# Altium PCB BoostBreakoutV1.PcbDoc
Units mil, origin at the board's own origin, x right, y up, seen from the top; angles counter-clockwise.
Board outline 806 x 642 mil, 2 copper layers (Top Layer, Bottom Layer); 16 components, 5 nets, 33 pads, 6 vias.
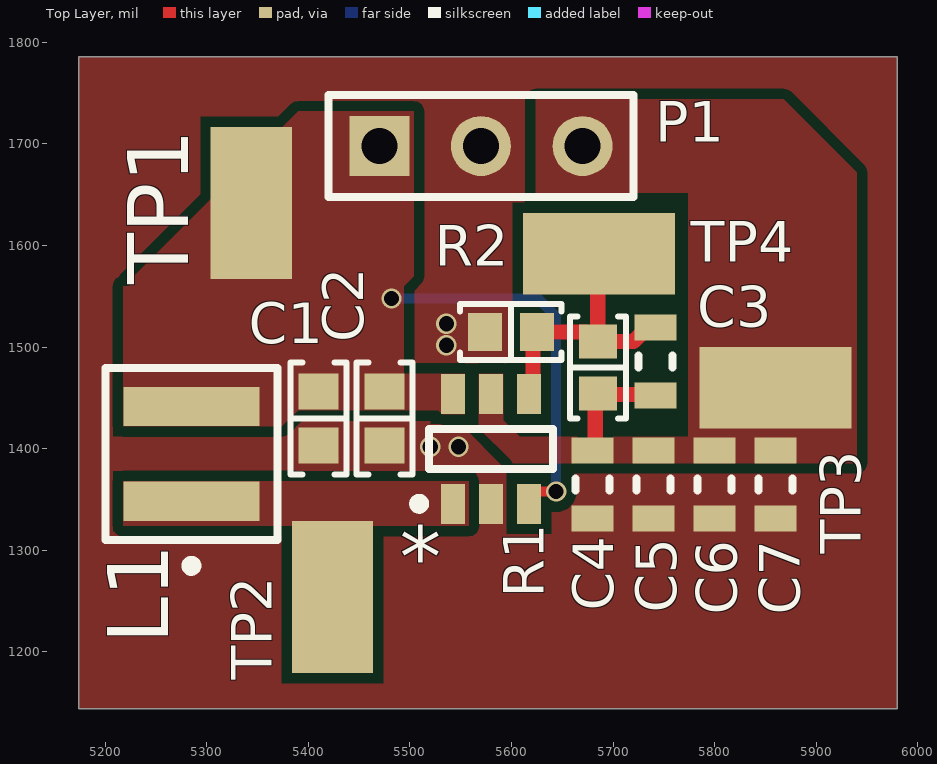
[diagram p0: Top Layer view]
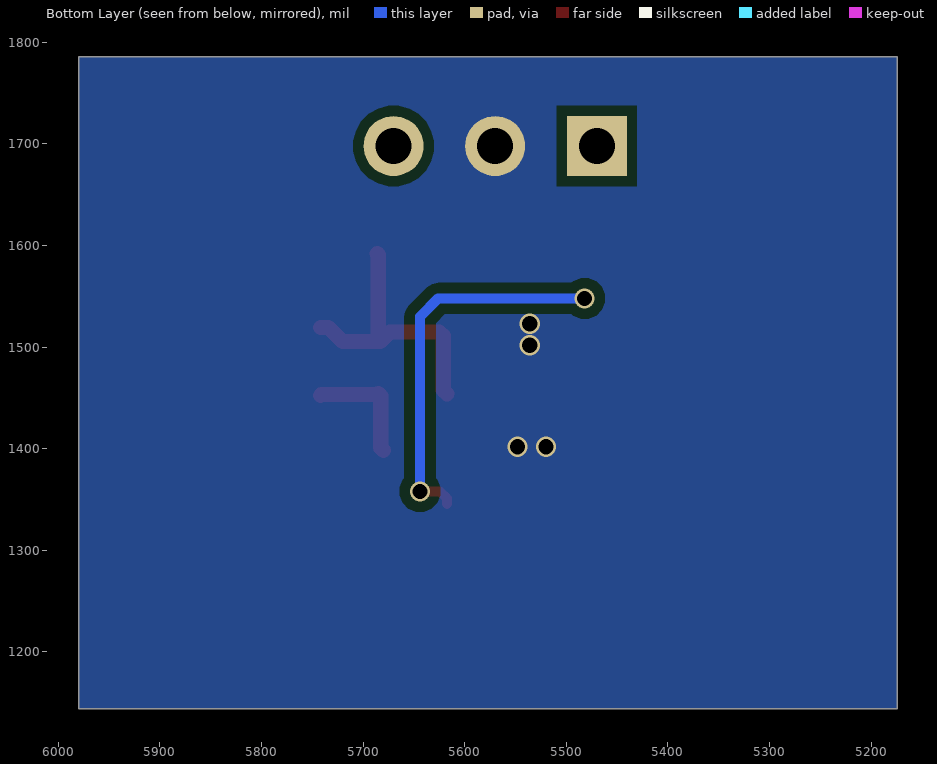
[diagram p1: Bottom Layer view, seen from below]
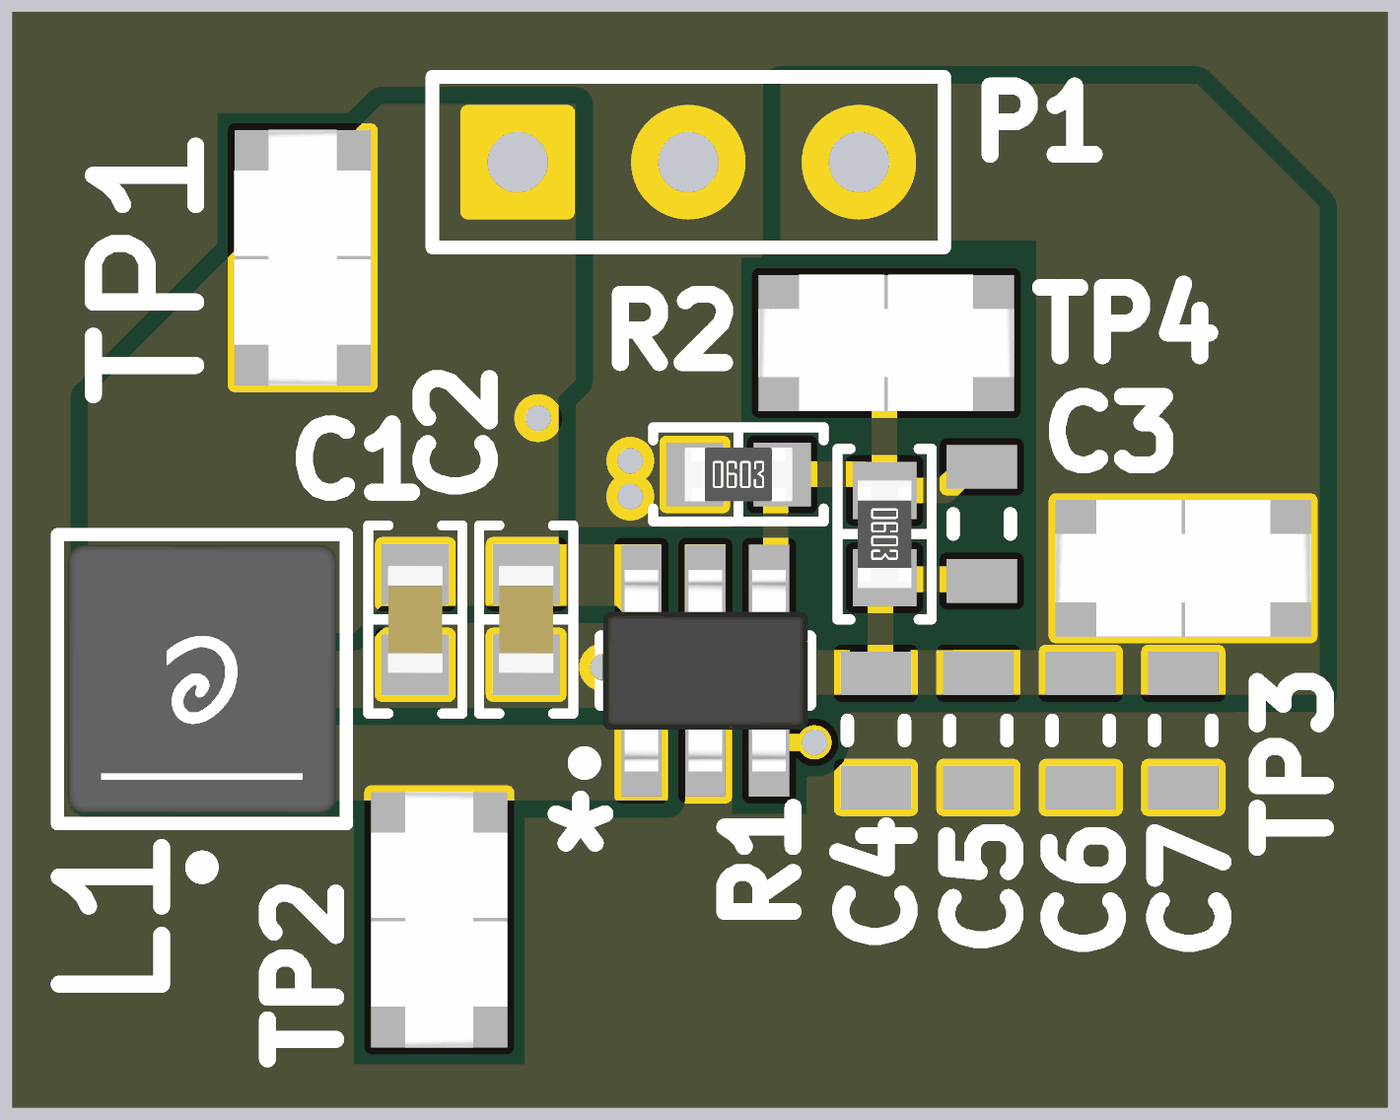
[diagram p2: 3D render of the assembled board from above, using the file's embedded part models]

## Layer stack, top to bottom
Top Solder: solder mask 0.4, Solder Resist, Dk 3.5
Top Layer: signal copper 1.4
Dielectric 1: dielectric 12.6, FR-4, Dk 4.8
Bottom Layer: signal copper 1.4
Bottom Solder: solder mask 0.4, Solder Resist, Dk 3.5

## Board outline
5174,1144 5980,1144 5980,1786 5174,1786

## Design rules (kind name [scope] priority, off if disabled: settings)
Clearance [All] p1: gap=10 ignorepadtopadclearanceinfootprint=FALSE except(0: Arc-Hole Track-Hole SMDPad-Hole THPad-Hole Via-Hole Fill-Hole Poly-Hole Region-Hole Text-Hole)
PolygonConnect [All] p1: connectstyle=Direct reliefconductorwidth=10 reliefentries=4 polygonreliefangle="90 Angle" airgapwidth=10
RoutingVias [All] p1: holewidth=28 width=50 viastyle="Through Hole" minholewidth=28 minwidth=50 maxholewidth=28 maxwidth=50
SolderMaskExpansion [All] p1: expansion=4 istentingtop=FALSE
Width [All] p1: maxlimit=50 minlimit=10 preferedwidth=10
30 further rules are at their usual default settings.

## Components (designator, comment, footprint, x,y, rotation, side; value= is the part's Value field where it differs from the comment)
* "TLV61070ADBVR" SOT95P280X145-6N 5580,1400 r90 top
C1 "10 µF" "CAP 0603_1608" 5410,1430 r270 top
C2 "10 µF" "CAP 0603_1608" 5475,1430 r270 top
C3 "C1608X5R1A226M080AC" CAPC1608X100X20ML10 5742,1486 r270 top
C4 "C1608X5R1A226M080AC" CAPC1608X100X20ML10 5680,1365 r90 top
C5 "C1608X5R1A226M080AC" CAPC1608X100X20ML10 5740,1365 r90 top
C6 "C1608X5R1A226M080AC" CAPC1608X100X20ML10 5800,1365 r90 top
C7 "C1608X5R1A226M080AC" CAPC1608X100X20ML10 5860,1365 r90 top
L1 "XGL4030-222MEC" FP-XGL4030-MFG 5285,1395 r90 top
P1 "Header 3" HDR1X3 5470,1698 r0 top
R1 "220 kOhms" "RES 0603_1608" 5685,1480 r270 top
R2 "24.3 kOhms" "RES 0603_1608" 5599.41,1515 r0 top
TP1 "5019" KSTN-5019_V 5344,1642 r90 top
TP2 "5019" KSTN-5019_V 5424,1254 r270 top
TP3 "5019" KSTN-5019_V 5860,1460 r0 top
TP4 "5019" KSTN-5019_V 5686,1592 r0 top

## Footprints (in the part's own frame and the unit in brackets; to place one, negate y for a bottom-side part, rotate by r counter-clockwise, add the part's x,y. Pads: shape width x height; smd on the part's side, far side on the other; paste and mask are expansions set on the pad)
"CAP 0603_1608" [mm] "Chip Capacitor, 2-Leads, Body 1.60x0.80mm, IPC Medium Density"
  rect 0.9x1 smd: 1(-0.675,0) 2(0.675,0)
  silkscreen extent -1.4,-0.7 1.4,0.7, body extent -0.8,-0.41 0.8,0.41, height 0.82
CAPC1608X100X20ML10 [mm] "Chip Capacitor, 2-Leads, Body 1.70x0.90mm, IPC Low Density"
  rect 0.65x1.05 smd: 1(-0.85,0) 2(0.85,0)
  silkscreen extent -0.15,-0.43 0.15,0.43, body extent -0.85,-0.45 0.85,0.45, height 1
FP-XGL4030-MFG [mm]
  rect 0.98x3.4 smd paste+0 mask+0: 1(-1.185,0) 2(1.185,0)
  silkscreen extent -2.92,-2.15 2.15,2.15, body extent -2.25,-2.25 2.25,2.25, height 0.25
HDR1X3 [mm] "Connector; Header; 3 Position"
  rect 1.5x1.5 hole 0.9: 1(0,0)
  round 1.5 hole 0.9: 2(2.54,0) 3(5.08,0)
  silkscreen extent -1.27,-1.27 6.35,1.27
KSTN-5019_V [mm] "Test Point, 1-Leads, Body 3.81x2.03mm"
  rect 3.8x2.03 smd: 1(0,0)
  body extent -1.9,-1.01 1.9,1.02, height 2.29
"RES 0603_1608" [mm] "Chip Resistor, 2-Leads, Body 1.60x0.80mm, IPC Medium Density"
  rect 0.85x0.95 smd: 1(-0.65,0) 2(0.65,0)
  silkscreen extent -1.27,-0.7 1.27,0.7, body extent -0.8,-0.4 0.8,0.4, height 0.45
SOT95P280X145-6N [mm] "SOT23, 6-Leads, Body 2.90x2.80mm, Pitch 0.95mm, IPC Medium Density"
  rect 1x0.6 smd: 1(-1.375,0.95) 2(-1.375,0) 3(-1.375,-0.95) 4(1.375,-0.95) 5(1.375,0) 6(1.375,0.95)
  silkscreen extent -1.5,-1.55 0.5,1.92, body extent -1.5,-1.53 1.5,1.53, height 1.45

## Part data
C1 C2: library part GRM188R61E106KA73J, "CAP CER 10UF 25V X5R 0603", Device Package="0603 (1608 Metric)", manufacturer="Murata Electronics", Operating Temperature="-55°C ~ 85°C", Supplier Part Number 1=490-GRM188R61E106KA73JCT-ND, Temperature Coefficient=X5R, Tolerance=±10%, Voltage - Rated=25V, Applications="General Purpose", Capacitance="10 µF", componentlink1description=Datasheet, componentlink1url=https://search.murata.co.jp/Ceramy/image/img/A01X/G101/ENG/GRM188R61E106KA73-01A.pdf, componentlink2description="DigiKey Link", componentlink2url=https://www.digikey.com/en/products/detail/murata-electronics/GRM188R61E106KA73J/9887674, lastupdated="2023-01-03 8:06:37 PM", Lifecycle Status=Active, Minimum Order=1, Mounting Type="Surface Mount, MLCC", Package / Case="0603 (1608 Metric)", packaging=TapeAndReel, Part Number=GRM188R61E106KA73J, Part Status=Active, partid=39529, price=0.04, series=GRM, Size / Dimension="0.063\" L x 0.031\" W (1.60mm x 0.80mm)", Supplier 1=DigiKey, Thickness (Max)="0.039\" (1.00mm)"
C3 C4 C5 C6 C7: library part CMP-2000-05441-1, "Chip Capacitor, 22 uF, +/- 20%, 10 V, -55 to 85 degC, 0603 (1608 Metric), RoHS, Tape and Reel", Capacitance=22µF, manufacturer=TDK, Operating Temperature=-55degC~85degC, Package / Case=0603(1608Metric), Package Description="2-Pin Surface Mount Device, Body 1.6 x 0.8 mm", Package Reference=603, PCN Part Number=MLCCPartNumberChange30/Nov/2012, Ratings=-, Standard Package=1, Temperature Coefficient=X5R, Tolerance=±20%, Voltage - Rated=10V, Applications=GeneralPurpose, Category=Capacitors, Datasheet URL=http://download.siliconexpert.com/pdfs/2015/4/21/15/54/45/779/tdk_/manual/37024850441143360mlcc_commercial_general_en.pdf, Datasheet Version=Mar-15, Design Resources=20WNon-IsolatedBuckLEDDriverUsingPLLNK460KG, Family=CeramicCapacitors, Features=-, Height - Seated (Max)=-, Kits=445-9014-KIT-ND-KITMLCC100PF-22UF060310-50V, Lead Spacing=-, Lead Style=-, Manufacturer URL=http://www.tdk.com/, Mounting Type=SurfaceMount,MLCC, Online Catalog=CSeries,GeneralPurpose, Other Names=445-9077-1, packaging=CutTape(CT), Product Training Modules=CSeriesGeneralApplicationsSEAT,CCV,andTVCLDesignToolsGuidetoReplacinganElectrolyticCapacitorwithanMLCC, RoHS Information=RoHSCertificate-MLCC, series=C, Size / Dimension="0.063\"Lx0.031\"W(1.60mmx0.80mm)", Thickness (Max)="0.035\"(0.90mm)"
L1: library part CMP-11268-000073-1, "Inductor Power Shielded Wirewound 2.2uH 20% 1MHz Composite 8.7A 15mOhm DCR Automotive T/R"
P1: "Header, 3-Pin", LatestRevisionDate=17-Jul-2002, LatestRevisionNote="Re-released for DXP Platform.", Publisher="Altium Limited"
R1: library part RC0603FR-07220KL, "RES 220K OHM 1% 1/10W 0603", Device Package="0603 (1608 Metric)", manufacturer=Yageo, Operating Temperature="-55°C ~ 155°C", Power (Watts)="0.1W, 1/10W", Supplier Device Package=0603, Supplier Part Number 1=311-220KHRCT-ND, Temperature Coefficient=±100ppm/°C, Tolerance=±1%, componentlink1description=Datasheet, componentlink1url=https://www.yageo.com/upload/media/product/productsearch/datasheet/rchip/PYu-RC_Group_51_RoHS_L_10.pdf, componentlink2description="DigiKey Link", componentlink2url=https://www.digikey.com/en/products/detail/yageo/RC0603FR-07220KL/727062, Composition="Thick Film", Features="Moisture Resistant", Height - Seated (Max)="0.022\" (0.55mm)", lastupdated="2023-01-02 8:29:28 PM", Lifecycle Status=Active, Minimum Order=1, Number of Terminations=2, Package / Case="0603 (1608 Metric)", packaging=CutTape, Part Number=RC0603FR-07220KL, Part Status=Active, partid=19015, price=0.01, Resistance="220 kOhms", series=RC_L, Size / Dimension="0.063\" L x 0.031\" W (1.60mm x 0.80mm)", Supplier 1=DigiKey
R2: library part RC0603FR-0724K3L, "RES 24.3K OHM 1% 1/10W 0603", Device Package="0603 (1608 Metric)", manufacturer=Yageo, Operating Temperature="-55°C ~ 155°C", Power (Watts)="0.1W, 1/10W", Supplier Device Package=0603, Supplier Part Number 1=311-24.3KHRCT-ND, Temperature Coefficient=±100ppm/°C, Tolerance=±1%, componentlink1description=Datasheet, componentlink1url=https://www.yageo.com/upload/media/product/productsearch/datasheet/rchip/PYu-RC_Group_51_RoHS_L_10.pdf, componentlink2description="DigiKey Link", componentlink2url=https://www.digikey.com/en/products/detail/yageo/RC0603FR-0724K3L/727078, Composition="Thick Film", Features="Moisture Resistant", Height - Seated (Max)="0.022\" (0.55mm)", lastupdated="2023-01-02 8:30:16 PM", Lifecycle Status=Active, Minimum Order=1, Number of Terminations=2, Package / Case="0603 (1608 Metric)", packaging=CutTape, Part Number=RC0603FR-0724K3L, Part Status=Active, partid=7644, price=0.01, Resistance="24.3 kOhms", series=RC_L, Size / Dimension="0.063\" L x 0.031\" W (1.60mm x 0.80mm)", Supplier 1=DigiKey
TP1 TP2 TP3 TP4: library part CMP-1672-00008-1, "Test Point, 1 Position SMD, RoHS, Tape and Reel", Package Quantity=1000, componentlink1description="Manufacturer URL", componentlink1url=http://www.keyelco.com/, componentlink2description=Datasheet, componentlink2url=http://www.keyelco.com/product-pdf.cfm?p=1357, Contact Plating=Silver, DatasheetVersion=03/2014, Mount="Surface Mount", Mounting Technology="Surface Mount", PackageDescription="1-Pin Surface Mount Device, Body 3.81 x 2.03 mm", PackageReference=5019, packaging="Tape and Reel", Pins=1, RoHSCompliant=True

## Via types
v1: diameter 20, hole 15, Top Layer to Bottom Layer, 6 vias

## Nets (pads, with @x,y where several pads share a name; then routed paths per layer and width w, separated by ;. In a path a pad name is that pad's centre, name@x,y a point inside that pad or via, vN(x,y) a via of type N, cw(c..) or ccw(c..) an arc to the next point about the centre after c; other vN are vias at no path point)
GND: *.2 C1.2 C2.2 C4.1 C5.1 C6.1 C7.1 P1.2 R2.1
  other v1: 5520,1402 5548,1402 5536,1502 5536,1523
Net*_1: *.1 L1.1 TP2.1
Net*_3: *.3 *.6 C1.1 C2.1 L1.2 P1.1 TP1.1 | length 376.2
  Top Layer w10: *.3 5617.4,1351.19 5624.21,1358 v1(5644,1358)
  Bottom Layer w10: v1(5482,1548) 5626,1548 5644,1530 v1(5644,1358)
Net*_4: *.4 C3.1 R1.1 R2.2 TP4.1 | length 277.5
  Top Layer w15: *.4 5621.2,1457.93 5621.2,1511.2 R2.2 5673.62,1515 5683.03,1505.59 R1.1 ; TP4.1 5685,1591 R1.1 ; C3.1 5734.13,1519.46 5720.25,1505.59 R1.1
Net*_5: *.5 C3.2 C4.2 C5.2 C6.2 C7.2 P1.3 R1.2 TP3.1 | length 115.8
  Top Layer w15: C4.2 5682.5,1400.96 5682.5,1451.91 R1.2 5685.94,1453.47 5741.06,1453.47 C3.2

## Polygon pours and split planes (outlines as drawn)
GND on Top Layer "GND_L01_P007" (solid, pour order 7): 5174,1786 5980,1786 5980,1144 5174,1144
Net*_3 on Top Layer "NET*_3_L01_P001" (solid, pour order 1): 5218,1560 5390,1732 5504,1732 5504,1570 5494,1560
Net*_5 on Top Layer "NET*_5_L01_P000" (solid, pour order 0): 5774,1652 5774,1412 5940,1412 5940,1672 5868,1744 5624,1744 5624,1652
GND on Top Layer "GND_L01_P006" (solid, pour order 6): 5590,1534 5558,1534 5554,1538 5520,1538 5520,1488 5550,1488 5558,1496 5590,1496
Net*_5 on Top Layer "NET*_5_L01_P005" (solid, pour order 5): 5568,1474 5568,1418 5600,1386 5940,1386 5940,1412 5608,1412 5592,1428 5592,1474
Net*_3 on Top Layer "NET*_3_L01_P004" (solid, pour order 4): 5218,1422 5374,1422 5390,1438 5528,1438 5532,1434 5554,1434 5554,1474 5494,1474 5494,1560 5218,1560
GND on Top Layer "GND_L01_P003" (solid, pour order 3): 5388,1422 5552,1422 5592,1382 5592,1326 5568,1326 5566,1328 5566,1378 5388,1378
Net*_1 on Top Layer "NET*_1_L01_P002" (solid, pour order 2): 5218,1368 5558,1368 5558,1324 5218,1324
GND on Bottom Layer "GND_L02_P008" (solid, pour order 8): 5174,1786 5980,1786 5980,1144 5174,1144